# EAGLE board HB-UNI-SenAct-4-4-RC (EAGLE 9.3.1)
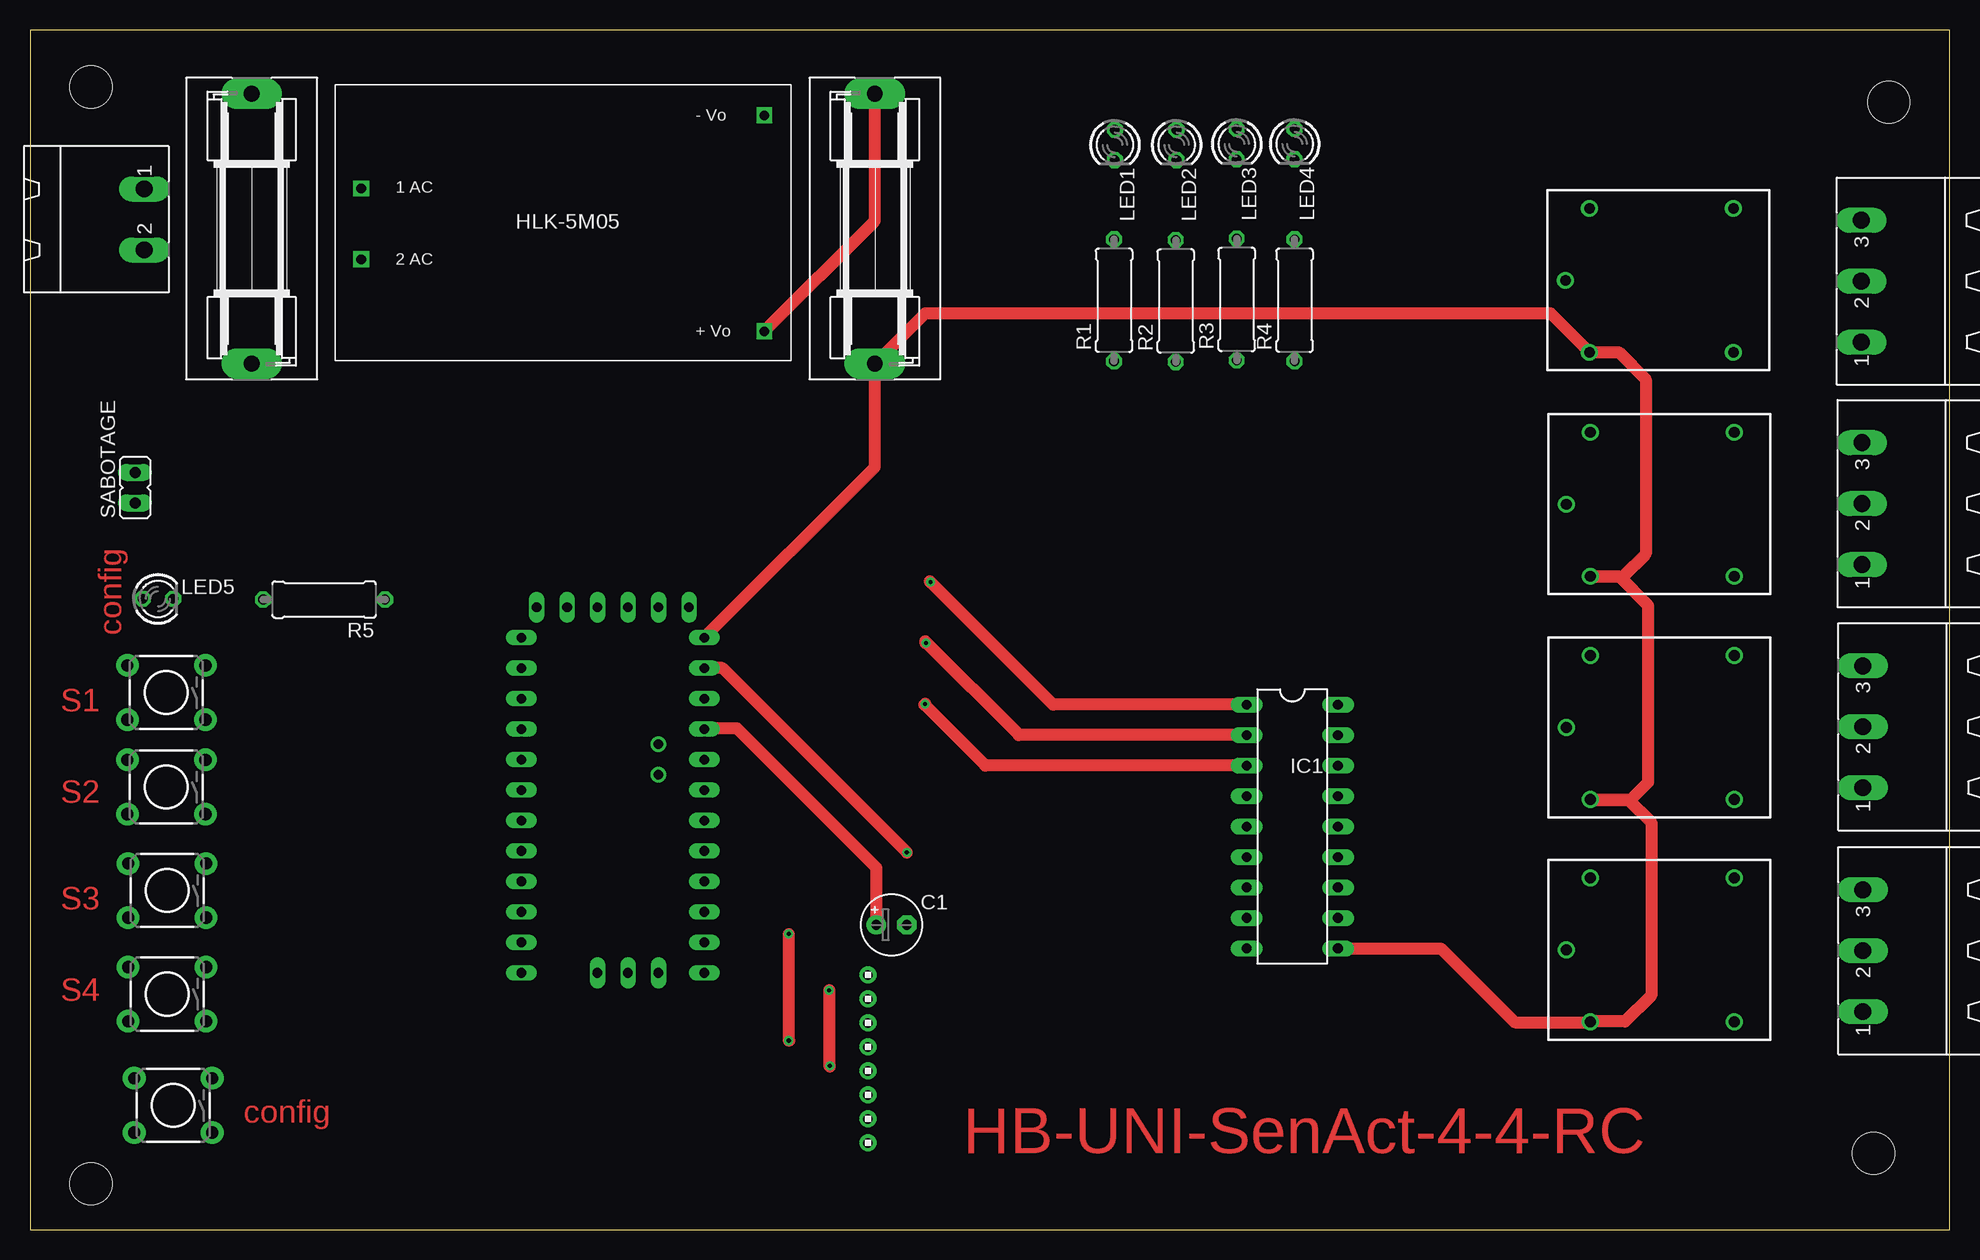
[diagram p0: board, top side]
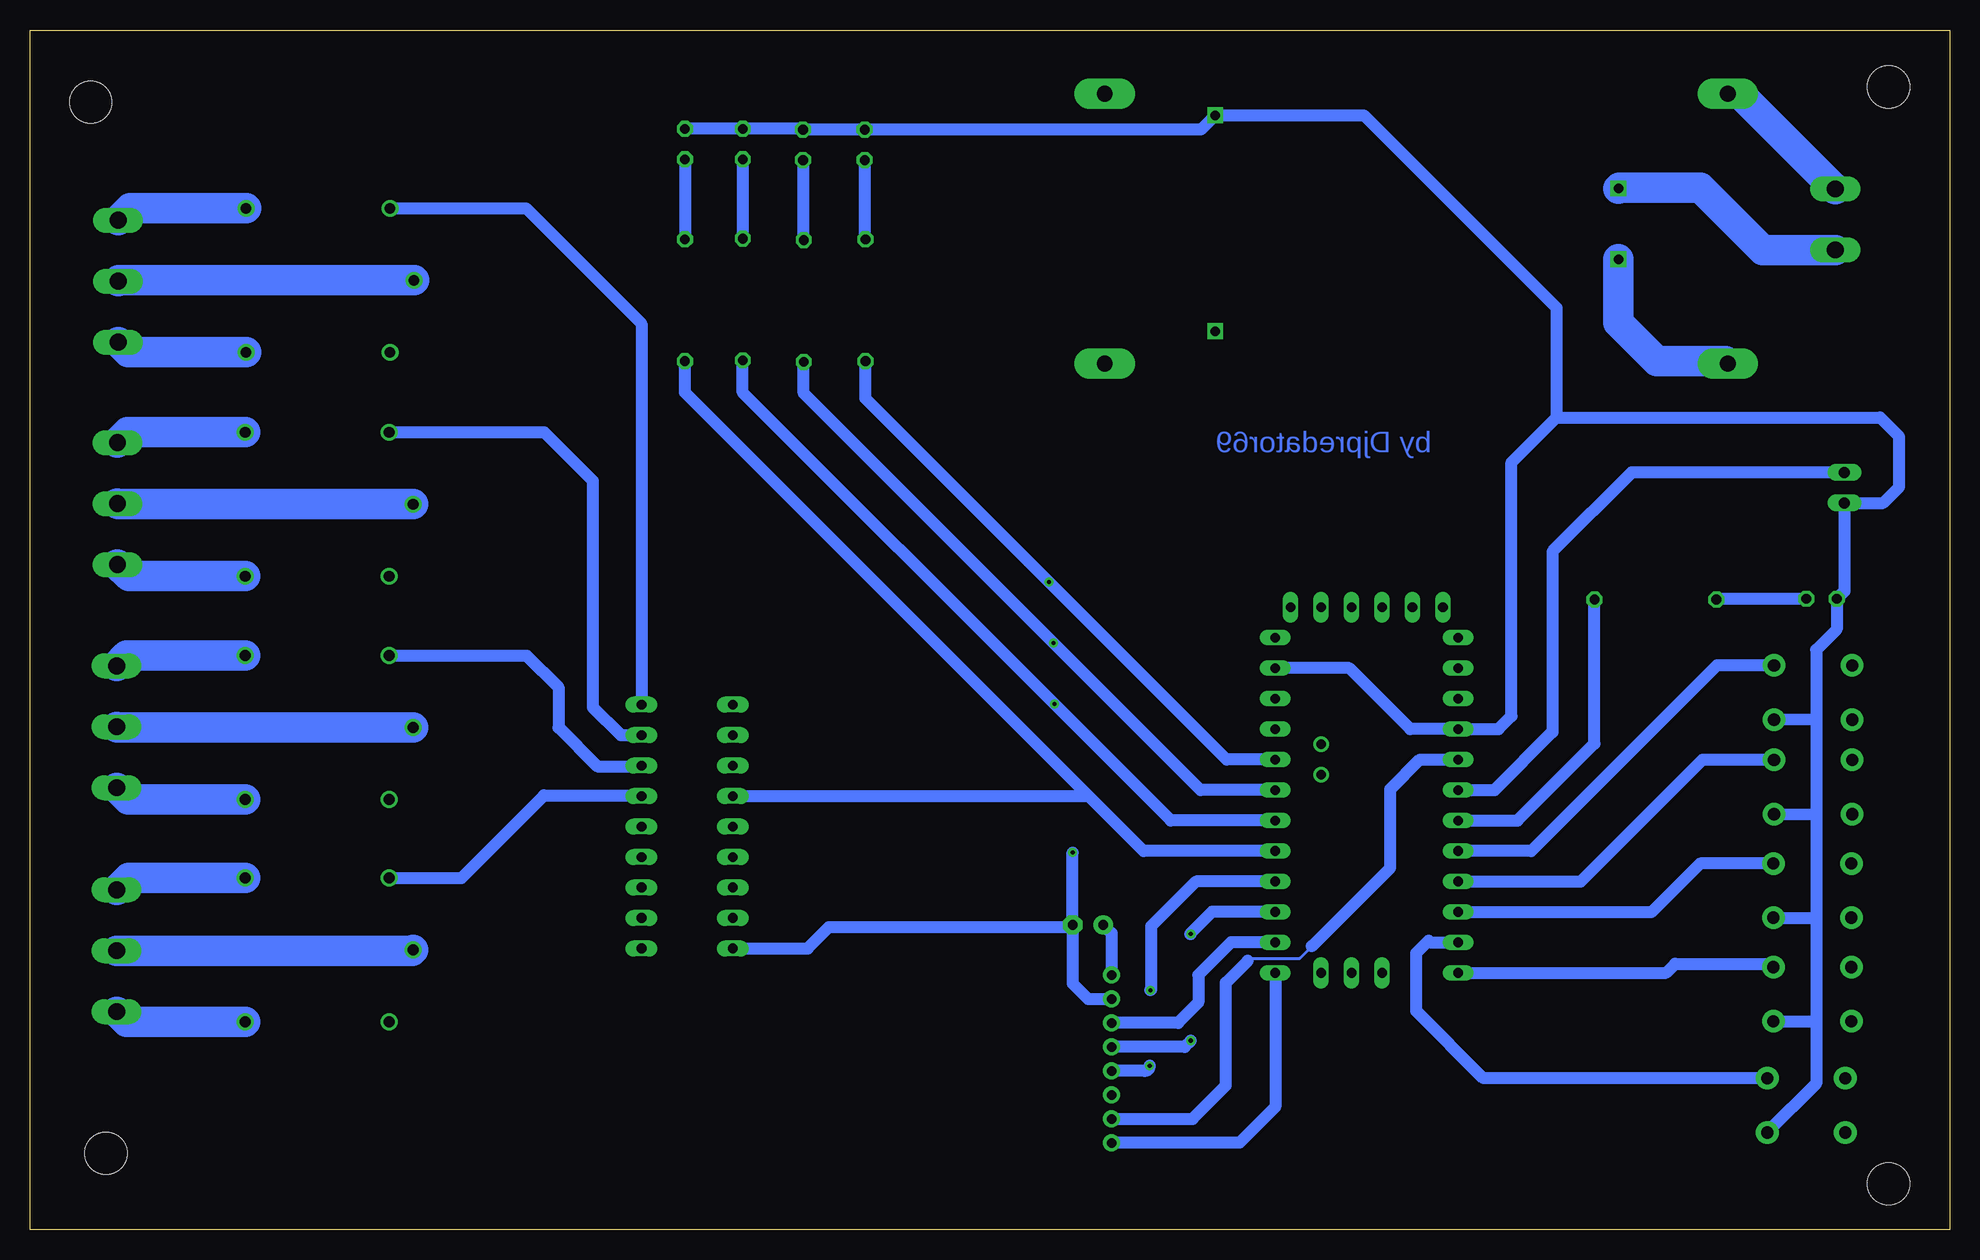
[diagram p1: board, bottom side, seen from below]

Size 160 x 100 mm. Coordinates in mm from the lower left corner, seen from the top.
Outline: 0,0 160,0 160,100 0,100 0,0
Copper layers (1*16): Top 0.035mm / dielectric 1.5mm / Bottom 0.035mm
Design rules "default": minimum track width 6mil, minimum drill 0.35mm, track to track 6mil, track to pad 6mil, pad to pad 6mil, via to via 6mil, smd to smd 6mil, copper to edge 40mil, drill to drill 6mil, minimum pad ring 10mil, minimum via ring 8mil, stop-mask expansion 4mil, vias tented up to drill 0mil, thermal gap 10mil
Holes 3.5 mm at 5.08,95.25 154.94,93.98 153.67,6.35 5.08,3.81

## Footprints (pad centres in the part's own frame; a part is rotated, then mirrored left to right if it is on the bottom)
E2,5-5 = drill 0.813 pad 1.6: + -1.27,0 | drill 0.813 pad 1.6 octagon: - 1.27,0
TACTILE_SWITCH_PTH_6.0MM_KIT = drill 1.016 pad 1.88: 1 -3.251,2.261; 2 3.251,2.261; 3 -3.251,-2.261; 4 3.251,-2.261
SH22,5A = drill 1.321 pad 2.54 long: 1 -11.252,0; 2 11.252,0
DIL18 = drill 0.813 long: 1 -10.16,-3.81; 2 -7.62,-3.81; 3 -5.08,-3.81; 4 -2.54,-3.81; 5 0,-3.81; 6 2.54,-3.81; 7 5.08,-3.81; 8 7.62,-3.81; 9 10.16,-3.81; 10 10.16,3.81; 11 7.62,3.81; 12 5.08,3.81; 13 2.54,3.81; 14 0,3.81; 15 -2.54,3.81; 16 -5.08,3.81; 17 -7.62,3.81; 18 -10.16,3.81
LED3MM = drill 0.813 octagon: A -1.27,0; K 1.27,0
0309/10 = drill 0.813 octagon: 1 -5.08,0; 2 5.08,0
JP1 = drill 0.914 long: 1 0,-1.27; 2 0,1.27
1X8 = drill 0.8 pad 1.422: 1 -7,0; 2 -5,0; 3 -3,0; 4 -1,0; 5 1,0; 6 3,0; 7 5,0; 8 7,0
ABK-PRO-MINI = drill 0.8 long: A0 10.16,-3.81; A1 10.16,-6.35; A2 10.16,-8.89; A3 10.16,-11.43; A6 3.81,-21.59; A7 6.35,-21.59; D2 -5.08,-3.81; D3 -5.08,-6.35; D4 -5.08,-8.89; D5 -5.08,-11.43; D6 -5.08,-13.97; D7 -5.08,-16.51; D8 -5.08,-19.05; D9 -5.08,-21.59; D10 10.16,-21.59; D11 10.16,-19.05; D12 10.16,-16.51; D13 10.16,-13.97; DTR 8.89,8.89; GND 10.16,3.81; GND1 -5.08,-1.27; GND2 -3.81,8.89; GND3 -1.27,8.89; GND4 1.27,-21.59; RAW 10.16,6.35; RST 10.16,1.27; RST1 -5.08,1.27; RX1 -5.08,3.81; RX1-1 3.81,8.89; TX0 -5.08,6.35; TX0-1 6.35,8.89; VCC 10.16,-1.27; VCC1 1.27,8.89 | drill 0.8: A4 6.35,-5.08; A5 6.35,-2.54
HLK-5M05 = drill 0.8 square: 1 -16.85,-2.93; 2 -16.85,2.97; 3 16.75,9.07; 4 16.75,-8.93
SRD-05VDC-SL-C = drill 0.9: COIL0 -5.39,-6.12; COIL1 -5.39,5.88; SWCLOSED 6.61,-6.12; SWCOMMON -7.39,-0.12; SWOPEN 6.61,5.88
MSTBA2 = drill 1.397 long: 1 -2.54,5.08; 2 2.54,5.08
MSTBA3 = drill 1.397 long: 1 -5.08,5.08; 2 0,5.08; 3 5.08,5.08

## Placement (x,y rotation side)
C1  [E2,5-5]  71.82,25.4 0 top
CONFIG  MOMENTARY-SWITCH-SPST-PTH-6.0MM-KIT  [TACTILE_SWITCH_PTH_6.0MM_KIT]  11.94,10.35 180 top
F1  [SH22,5A]  18.48,83.44 270 top
F2  [SH22,5A]  70.42,83.44 270 top
IC1  [DIL18]  105.22,33.59 270 top
LED1  [LED3MM]  90.42,90.42 270 top
LED2  [LED3MM]  95.57,90.42 270 top
LED3  [LED3MM]  100.58,90.49 270 top
LED4  [LED3MM]  105.41,90.49 270 top
LED5  [LED3MM]  10.67,52.58 0 top
R1  [0309/10]  90.36,77.47 90 top
R2  [0309/10]  95.5,77.41 90 top
R3  [0309/10]  100.58,77.53 90 top
R4  [0309/10]  105.41,77.47 90 top
R5  [0309/10]  24.51,52.51 180 top
S1  MOMENTARY-SWITCH-SPST-PTH-6.0MM-KIT  [TACTILE_SWITCH_PTH_6.0MM_KIT]  11.37,44.77 180 top
S2  MOMENTARY-SWITCH-SPST-PTH-6.0MM-KIT  [TACTILE_SWITCH_PTH_6.0MM_KIT]  11.37,36.89 180 top
S3  MOMENTARY-SWITCH-SPST-PTH-6.0MM-KIT  [TACTILE_SWITCH_PTH_6.0MM_KIT]  11.43,28.26 180 top
S4  MOMENTARY-SWITCH-SPST-PTH-6.0MM-KIT  [TACTILE_SWITCH_PTH_6.0MM_KIT]  11.43,19.62 180 top
SABOTAGE  [JP1]  8.76,61.85 0 top
U$1  1X8  [1X8]  69.85,14.22 270 top
U$2  ABK-PRO-MINI  [ABK-PRO-MINI]  46.04,42.99 0 top
U$3  5VDC/5W  [HLK-5M05]  44.45,83.82 0 top
U$4  RELAYPTH  [SRD-05VDC-SL-C]  135.38,79.25 0 top
U$5  RELAYPTH  [SRD-05VDC-SL-C]  135.45,60.58 0 top
U$6  RELAYPTH  [SRD-05VDC-SL-C]  135.45,41.97 0 top
U$7  RELAYPTH  [SRD-05VDC-SL-C]  135.45,23.43 0 top
X1  MSTBA2  [MSTBA2]  4.45,84.2 270 top
X2  MSTBA3  [MSTBA3]  157.73,79.06 90 top
X3  MSTBA3  [MSTBA3]  157.8,60.52 90 top
X4  MSTBA3  [MSTBA3]  157.86,41.91 90 top
X5  MSTBA3  [MSTBA3]  157.86,23.24 90 top

## Library data of the parts
C1 R1-R5 = resistor
CONFIG S1-S4 = SparkFun-Switches; PROD_ID: SWCH-08441; SF_SKU: COM-00097
F1 F2 = fuse; MPN: 0031.7701.11; OC_FARNELL: unknown; OC_NEWARK: 04F1224
IC1 = uln-udn
LED1-LED5 = led
SABOTAGE = jumper
U$1 = headers(2mm)
U$2 = Arduino-clone
U$3 = HLK-5M05; SIZE: 23x38(mm)
U$4-U$7 = SRD-05VDC-SL-C
X1 = con-phoenix-508; MF: FARNELL; MPN: 1757242; OC_FARNELL: 3705171; OC_NEWARK: 71C4161
X2-X5 = con-phoenix-508; MF: FARNELL; MPN: 1757255; OC_FARNELL: 3705183; OC_NEWARK: 71C4162

## Nets
CSN: U$1.8 U$2.D10
GDO0: U$1.7 U$2.D2
GND: C1.- CONFIG.1 IC1.9 LED1.A LED2.A LED3.A LED4.A LED5.A S1.1 S2.1 S3.1 S4.1 SABOTAGE.1 U$1.2 U$2.GND U$2.GND1 U$3.3
N$1: IC1.1 R1.1 U$2.A0
N$2: IC1.2 R2.1 U$2.A1
N$3: IC1.3 R3.1 U$2.A2
N$4: IC1.4 R4.1 U$2.A3
N$5: LED1.K R1.2
N$6: LED2.K R2.2
N$7: LED3.K R3.2
N$8: LED4.K R4.2
N$9: F1.1 X1.1
N$10: F2.1 U$3.4
N$11: U$3.2 X1.2
N$12: S1.3 U$2.D5
N$13: S2.3 U$2.D6
N$14: S3.3 U$2.D7
N$15: S4.3 U$2.D9
N$16: CONFIG.3 U$2.D8
N$17: R5.1 U$2.D4
N$18: LED5.K R5.2
N$19: F1.2 U$3.1
N$20: SABOTAGE.2 U$2.D3
N$21: U$6.SWCLOSED X4.1
N$22: U$7.SWCOMMON X5.2
N$23: U$6.SWOPEN X4.3
N$24: F2.2 IC1.10 U$2.RAW U$4.COIL0 U$5.COIL0 U$6.COIL0 U$7.COIL0
N$25: U$7.SWCLOSED X5.1
N$26: U$6.SWCOMMON X4.2
N$27: U$7.SWOPEN X5.3
N$28: U$5.SWOPEN X3.3
N$29: U$5.SWCOMMON X3.2
N$30: U$5.SWCLOSED X3.1
N$31: U$4.SWOPEN X2.3
N$32: U$4.SWCOMMON X2.2
N$33: U$4.SWCLOSED X2.1
N$34: IC1.18 U$4.COIL1
N$35: IC1.17 U$5.COIL1
N$36: IC1.16 U$6.COIL1
N$37: IC1.15 U$7.COIL1
SCLK: U$1.4 U$2.D12
SI: U$1.3 U$2.D11
SO: U$1.5 U$2.D13
VCC: C1.+ U$1.1 U$2.VCC

## Tracks (layer width: path | path; a pad name or v marks a point on that pad's centre or on a via)
CSN
  Bottom 1.016: U$2.D10 56.2,10.22 59.18,7.24 69.83,7.24 U$1.8
GDO0
  Bottom 0.254: 58.48,22.42 58.29,22.61 54.17,22.61 53.15,23.62
  Bottom 1.016: U$1.7 63.1,9.22 60.33,12 60.33,20.57 58.48,22.42 | 53.15,23.62 46.61,30.16 46.61,36.7 44.13,39.18 U$2.D2
GND  (via drill 0.35)
  Top 1.016: v73.09,31.43 57.72,46.8 U$2.GND
  Bottom 1.016: 11.11,42.55 11.11,48.32 9.4,50.04 LED5.A 8.76,53.21 SABOTAGE.1 5.52,60.58 4.19,61.91 4.19,66.1 5.78,67.69 32.77,67.69 | 11.11,42.55 11.11,34.61 | 11.11,34.61 11.11,25.97 | 11.11,25.97 11.11,17.34 | 11.11,17.34 11.11,12.17 CONFIG.1 | S4.1 11.11,17.34 | S3.1 11.11,25.97 | S2.1 11.11,34.61 | S1.1 11.11,42.55 | 32.77,67.69 36.51,63.94 36.51,42.8 37.59,41.72 U$2.GND1 44.96,41.72 50.04,46.8 U$2.GND | 32.77,67.69 32.77,76.83 48.82,92.89 U$3.3 62.4,91.69 LED1.A LED2.A 95.63,91.76 LED3.A LED4.A | C1.- 73.09,20.51 71.8,19.22 U$1.2 | IC1.9 95.19,23.43 93.41,25.21 73.28,25.21 C1.- | C1.- v73.09,31.43
N$1  (via drill 0.35)
  Top 1.016: IC1.1 85.28,43.75 v75.06,53.98 74.99,54.04
  Bottom 1.016: U$2.A0 60.26,39.18 v75.06,53.98 90.36,69.28 R1.1
N$2  (via drill 0.35)
  Top 1.016: IC1.2 82.42,41.21 74.61,49.02 74.61,48.96 v74.68,48.9
  Bottom 1.016: U$2.A1 62.42,36.64 v74.68,48.9 95.5,69.72 R2.1
N$3  (via drill 0.35)
  Top 1.016: 74.61,43.75 74.55,43.75 | 74.55,43.75 v74.61,43.81 | IC1.3 79.63,38.67 74.55,43.75
  Bottom 1.016: U$2.A2 64.9,34.1 v74.61,43.81 100.58,69.79 R3.1
N$4
  Bottom 1.016: U$2.A3 67.18,31.56 71.75,36.13 | R4.1 105.41,69.79 71.75,36.13 | IC1.4 71.75,36.13
N$5
  Bottom 1.016: LED1.K 90.42,82.61 R1.2
N$6
  Bottom 1.016: LED2.K 95.57,82.55 R2.2
N$7
  Bottom 1.016: LED3.K R3.2
N$8
  Bottom 1.016: LED4.K R4.2
N$9
  Bottom 2.54: F1.1 17.48,94.69 X1.1
N$10
  Top 1.016: U$3.4 70.42,84.11 F2.1
N$11
  Bottom 2.54: X1.2 15.56,81.66 20.77,86.87 27.52,86.87 U$3.2
N$12
  Bottom 1.016: S1.3 19.39,47.03 34.86,31.56 U$2.D5
N$13
  Bottom 1.016: U$2.D6 30.73,29.02 20.57,39.18 14.64,39.18 S2.3
N$14
  Bottom 1.016: U$2.D7 24.89,26.48 24.86,26.45 20.79,30.52 S3.3
N$15
  Bottom 1.016: U$2.D9 23.62,21.4 22.86,22.16 14.96,22.16 S4.3
N$16
  Bottom 1.016: CONFIG.3 38.84,12.61 44.45,18.22 44.45,23.05 43.43,24.07 43.31,23.94 U$2.D8
N$17
  Bottom 1.016: U$2.D4 36.01,34.1 29.59,40.51 R5.1
N$18
  Bottom 1.016: R5.2 19.43,52.58 LED5.K
N$19
  Bottom 2.54: U$3.1 27.6,75.61 24.38,72.39 18.68,72.39 F1.2
N$20
  Bottom 1.016: U$2.D3 37.91,36.64 33.08,41.47 33.08,56.52 26.48,63.12 SABOTAGE.2
N$21
  Bottom 2.54: U$6.SWCLOSED 151.8,35.85 X4.1
N$22
  Bottom 2.54: X5.2 128.13,23.24 U$7.SWCOMMON
N$23
  Bottom 2.54: U$6.SWOPEN 151.92,47.85 X4.3
N$24
  Top 1.016: IC1.10 117.6,23.43 123.76,17.27 130.02,17.27 U$7.COIL0 130.08,17.34 132.97,17.34 135.13,19.49 135.13,33.97 133.25,35.85 U$6.COIL0 130.09,35.81 133.41,35.81 134.87,37.27 134.87,52.01 132.42,54.46 U$5.COIL0 130.09,54.42 132.78,54.42 134.68,56.33 134.68,70.87 132.42,73.13 U$4.COIL0 126.73,76.39 74.62,76.39 F2.2 70.42,63.56 U$2.RAW
N$25
  Bottom 2.54: U$7.SWCLOSED 151.93,17.31 X5.1
N$26
  Bottom 2.54: U$6.SWCOMMON 152.72,41.85 X4.2
N$27
  Bottom 2.54: U$7.SWOPEN 151.79,29.31 X5.3
N$28
  Bottom 2.54: U$5.SWOPEN 151.85,66.46 X3.3
N$29
  Bottom 2.54: U$5.SWCOMMON 152.66,60.46 X3.2
N$30
  Bottom 2.54: U$5.SWCLOSED 151.74,54.46 X3.1
N$31
  Bottom 2.54: U$4.SWOPEN 151.66,85.13 X2.3
N$32
  Bottom 2.54: U$4.SWCOMMON 152.58,79.13 X2.2
N$33
  Bottom 2.54: U$4.SWCLOSED 151.8,73.13 X2.1
N$34
  Bottom 1.016: U$4.COIL1 118.66,85.13 109.03,75.5 IC1.18
N$35
  Bottom 1.016: U$5.COIL1 117.13,66.46 113.09,62.42 113.09,43.56 110.74,41.21 IC1.17
N$36
  Bottom 1.016: U$6.COIL1 118.59,47.85 115.95,45.21 115.95,41.85 112.71,38.61 109.09,38.61 IC1.16
N$37
  Bottom 1.016: U$7.COIL1 124.04,29.31 117.16,36.2 109.09,36.2 IC1.15
SCLK  (via drill 0.35)
  Top 1.016: v63.25,24.64 63.25,15.81 63.31,15.75 v63.25,15.75
  Bottom 1.016: U$2.D12 61.47,26.48 63.31,24.64 v63.25,24.64 | v63.25,15.75 63.77,15.22 U$1.4
SI
  Bottom 1.016: U$2.D11 59.88,23.94 62.61,21.21 62.61,18.92 64.31,17.22 U$1.3
SO  (via drill 0.35)
  Top 1.016: v66.61,19.94 66.61,13.65 66.67,13.59 v66.67,13.65
  Bottom 1.016: U$2.D13 62.8,29.02 66.55,25.27 66.55,20 v66.61,19.94 | v66.67,13.65 arc90 67.1,13.22 U$1.5
VCC
  Top 1.016: C1.+ 70.55,30.16 58.93,41.78 56.26,41.78 U$2.VCC
  Bottom 1.016: C1.+ 69.85,24.7 U$1.1

## Text on the board
Top: config | S1 | S2 | S3 | S4 | HB-UNI-SenAct-4-4-RC | config
Bottom: by Djpredator69